# EAGLE board v3-landshark-handheld-controller (EAGLE 6.6.0)
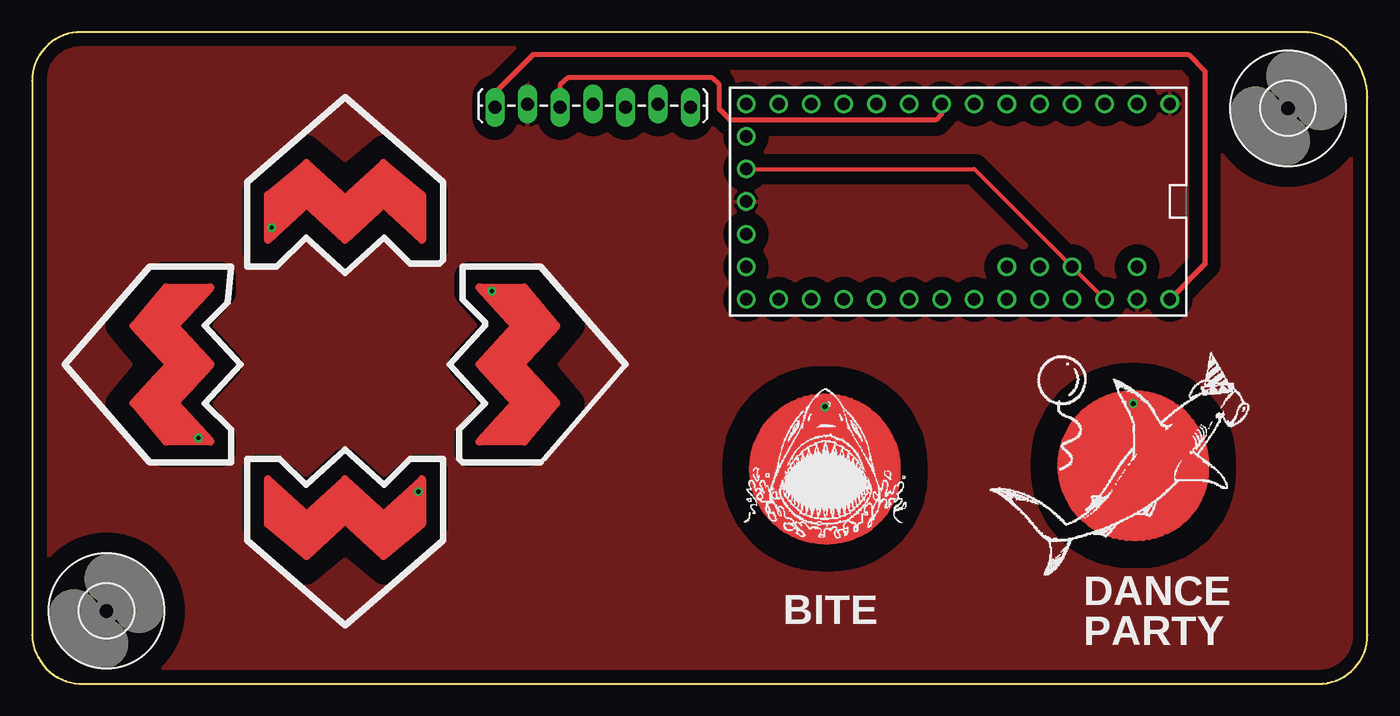
[diagram p0: board, top side]
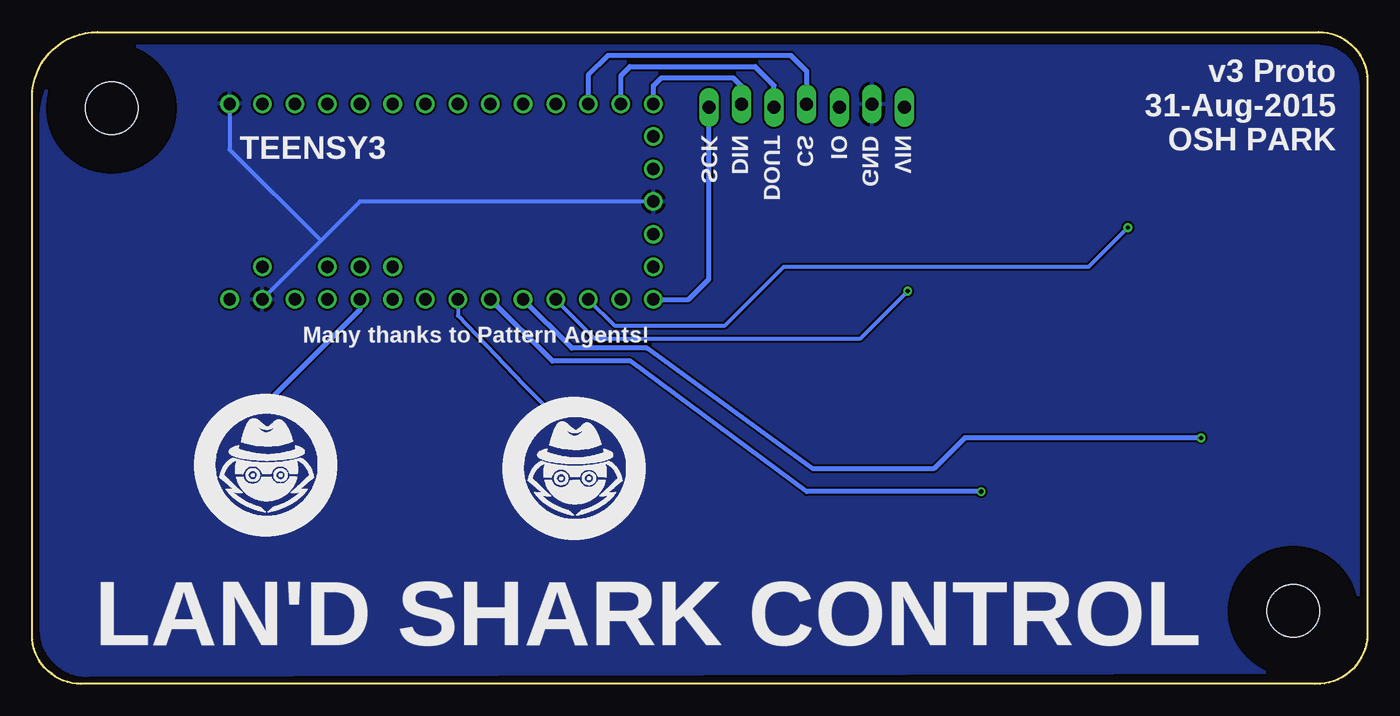
[diagram p1: board, bottom side, seen from below]

Size 104.04 x 50.8 mm. Coordinates in mm from the lower left corner, seen from the top.
Outline: 0,46.99 0,3.81 arc90 4.06,0 100.23,0 arc90 104.04,3.81 104.04,45.72 arc90 98.96,50.8 3.81,50.8 arc90 0,46.99
Copper layers (1*16): Top 0.0356mm / dielectric 1.5011mm / Bottom 0.0356mm
Design rules "oshpark-2layer": minimum track width 6mil, minimum drill 13mil, track to track 6mil, track to pad 6mil, pad to pad 6mil, via to via 6mil, smd to smd 6mil, copper to edge 15mil, drill to drill 6mil, minimum pad ring 7mil, minimum via ring 7mil, stop-mask expansion 4mil, vias tented up to drill 0mil, thermal gap 10mil

## Footprints (pad centres in the part's own frame; a part is rotated, then mirrored left to right if it is on the bottom)
BUTTON_PASSIVE_12MM_BITE = drill 0.356: BUTTON 0,4.826
SLIDER_PASSIVE_1SEG_12MM = drill 0.33: P$1 -5.715,-2.54
BUTTON_PASSIVE_12MM_DANCE = drill 0.356: BUTTON 0,4.826
4,1 = hole 4.1: 0,0
1X07_LOCK_LONGPADS = drill 1.016 long: 1 0,0.127; 2 2.54,-0.127; 3 5.08,0.127; 4 7.62,-0.127; 5 10.16,0.127; 6 12.7,-0.127; 7 15.24,0.127
TEENSY_3.0+4 = drill 0.965: 0 -7.62,13.97; 1 -7.62,11.43; 2 -7.62,8.89; 3 -7.62,6.35; 3.3V 7.62,11.43; 3.3V1 -2.54,-16.51; 4 -7.62,3.81; 5 -7.62,1.27; 6 -7.62,-1.27; 7 -7.62,-3.81; 8 -7.62,-6.35; 9 -7.62,-8.89; 10 -7.62,-11.43; 11 -7.62,-13.97; 12 -7.62,-16.51; 13 7.62,-16.51; 14/A0 7.62,-13.97; 15/A1 7.62,-11.43; 16/A2 7.62,-8.89; 17/A3 7.62,-6.35; 18/A4 7.62,-3.81; 19/A5 7.62,-1.27; 20/A6 7.62,1.27; 21/A7 7.62,3.81; 22/A8 7.62,6.35; 23/A9 7.62,8.89; A10 5.08,6.35; A11 5.08,3.81; AGND 7.62,13.97; AREF 5.08,8.89; GND -7.62,16.51; GND1 0,-16.51; PGM 2.54,-16.51; RESET 5.08,-16.51; VBAT -5.08,-16.51; VIN 7.62,16.51; VUSB 5.08,13.97

## Placement (x,y rotation side)
BITE  [BUTTON_PASSIVE_12MM_BITE]  61.77,16.76 0 top
BOTTOM  SLIDER_PASSIVE_1SEG  [SLIDER_PASSIVE_1SEG_12MM]  24.38,12.45 180 top
DANCE  [BUTTON_PASSIVE_12MM_DANCE]  85.8,17.02 0 top
H1  MOUNT-HOLE4.1  [4,1]  97.84,44.86 0 top
H2  MOUNT-HOLE4.1  [4,1]  5.79,5.69 0 top
J1  BREAKOUT  [1X07_LOCK_LONGPADS]  51.31,45.06 180 top
LEFT  SLIDER_PASSIVE_1SEG  [SLIDER_PASSIVE_1SEG_12MM]  10.41,24.89 90 top
RIGHT  SLIDER_PASSIVE_1SEG  [SLIDER_PASSIVE_1SEG_12MM]  38.35,24.89 270 top
TEENSY3  [TEENSY_3.0+4]  72.14,37.59 270 top
TOP  SLIDER_PASSIVE_1SEG  [SLIDER_PASSIVE_1SEG_12MM]  24.38,38.1 0 top

## Library data of the parts
BITE BOTTOM DANCE LEFT RIGHT TOP = PatternAgents-TouchWidgets
H1 H2 = holes
J1 = SparkFun-Connectors
TEENSY3 = Teensy3.0

## Nets
3.3V: TEENSY3.3.3V TEENSY3.3.3V1 TEENSY3.AREF
BITE: BITE.BUTTON TEENSY3.19/A5
BOTTOM: BOTTOM.P$1 TEENSY3.18/A4
DIG_IO: J1.5 TEENSY3.6
GND: J1.6 TEENSY3.AGND TEENSY3.GND TEENSY3.GND1
HALT: DANCE.BUTTON TEENSY3.22/A8
LEFT: LEFT.P$1 TEENSY3.17/A3
RIGHT: RIGHT.P$1 TEENSY3.16/A2
SPI_CS: J1.4 TEENSY3.10
SPI_DIN: J1.2 TEENSY3.12
SPI_DOUT: J1.3 TEENSY3.11
SPI_SCK: J1.1 TEENSY3.13
TOP: TEENSY3.15/A1 TOP.P$1
VBAT: TEENSY3.VBAT
VIN: J1.7 TEENSY3.VIN
VUSB: TEENSY3.VUSB

## Tracks (layer width: path | path; a pad name or v marks a point on that pad's centre or on a via)
3.3V
  Top 0.33: TEENSY3.3.3V1 73.41,40.13 TEENSY3.AREF TEENSY3.3.3V
BITE
  Bottom 0.33: TEENSY3.19/A5 70.87,28.7 65.73,23.32 64.01,21.59 BITE.BUTTON
BOTTOM
  Bottom 0.406: BOTTOM.P$1 43.69,14.99 57.4,25.15 63.5,25.15 TEENSY3.18/A4
DIG_IO
  Top 0.406: TEENSY3.6 70.87,44.4 70.41,43.94 54.41,43.94 53.54,44.81 53.54,46.69 52.98,47.24 41.76,47.24 41.15,46.69 J1.5
GND
  Bottom 0.33: TEENSY3.GND1 78.49,37.59 81.53,34.54 | 81.53,34.54 TEENSY3.AGND | TEENSY3.GND 88.65,41.66 81.53,34.54
  pour Top (isolate 1.016): 0.76,4.06 arc90 3.81,1.02 99.72,0.76 arc90 103.28,4.32 103.28,44.7 arc90 97.69,50.29 3.81,49.78 arc90 0.76,46.74
  pour Bottom: 0.76,3.96 arc90 3.81,0.91 99.72,0.66 arc90 103.28,4.22 103.28,44.25 arc90 97.79,49.68 3.81,49.68 arc90 0.76,46.63
HALT
  Bottom 0.406: TEENSY3.22/A8 78.49,29.16 DANCE.BUTTON
LEFT
  Bottom 0.406: LEFT.P$1 31.37,19.18 33.78,16.76 43.18,16.76 56.13,26.16 61.98,26.16 TEENSY3.17/A3
RIGHT
  Bottom 0.33: TEENSY3.16/A2 60.2,26.92 39.5,26.92 RIGHT.P$1
SPI_CS
  Bottom 0.406: TEENSY3.10 60.71,47.45 59.18,48.97 44.91,48.97 43.69,47.75 J1.4
SPI_DIN
  Bottom 0.406: TEENSY3.12 55.63,46.63 55.02,47.24 49.43,47.24 48.77,46.58 J1.2
SPI_DOUT
  Bottom 0.406: TEENSY3.11 58.17,47.4 57.45,48.11 47.7,48.11 46.23,46.63 J1.3
SPI_SCK
  Bottom 0.406: TEENSY3.13 52.88,29.97 51.31,31.55 J1.1
TOP
  Bottom 0.33: TEENSY3.15/A1 58.67,27.94 50.04,27.94 45.47,32.51 21.72,32.51 TOP.P$1
VIN
  Top 0.406: TEENSY3.VIN 91.39,32.72 91.39,47.75 90.07,49.07 39.06,49.07 36.07,46.08 J1.7

## Text on the board
tPlace: PARTY
bPlace: VIN | GND | IO | CS | DOUT | DIN | SCK | v3 Proto / 31-Aug-2015 / OSH PARK | Many thanks to Pattern Agents! | LAN'D SHARK CONTROL